# Altium PCB PowerBoard.PcbDoc (part 1 of 3)
Units mm, origin at the board's own origin, x right, y up, seen from the top; angles counter-clockwise.
Board outline 222.5 x 110 mm, 4 copper layers (Top Layer, Internal Plane 2, Internal Plane 1, Bottom Layer); 330 components, 249 nets, 1088 pads, 487 vias.
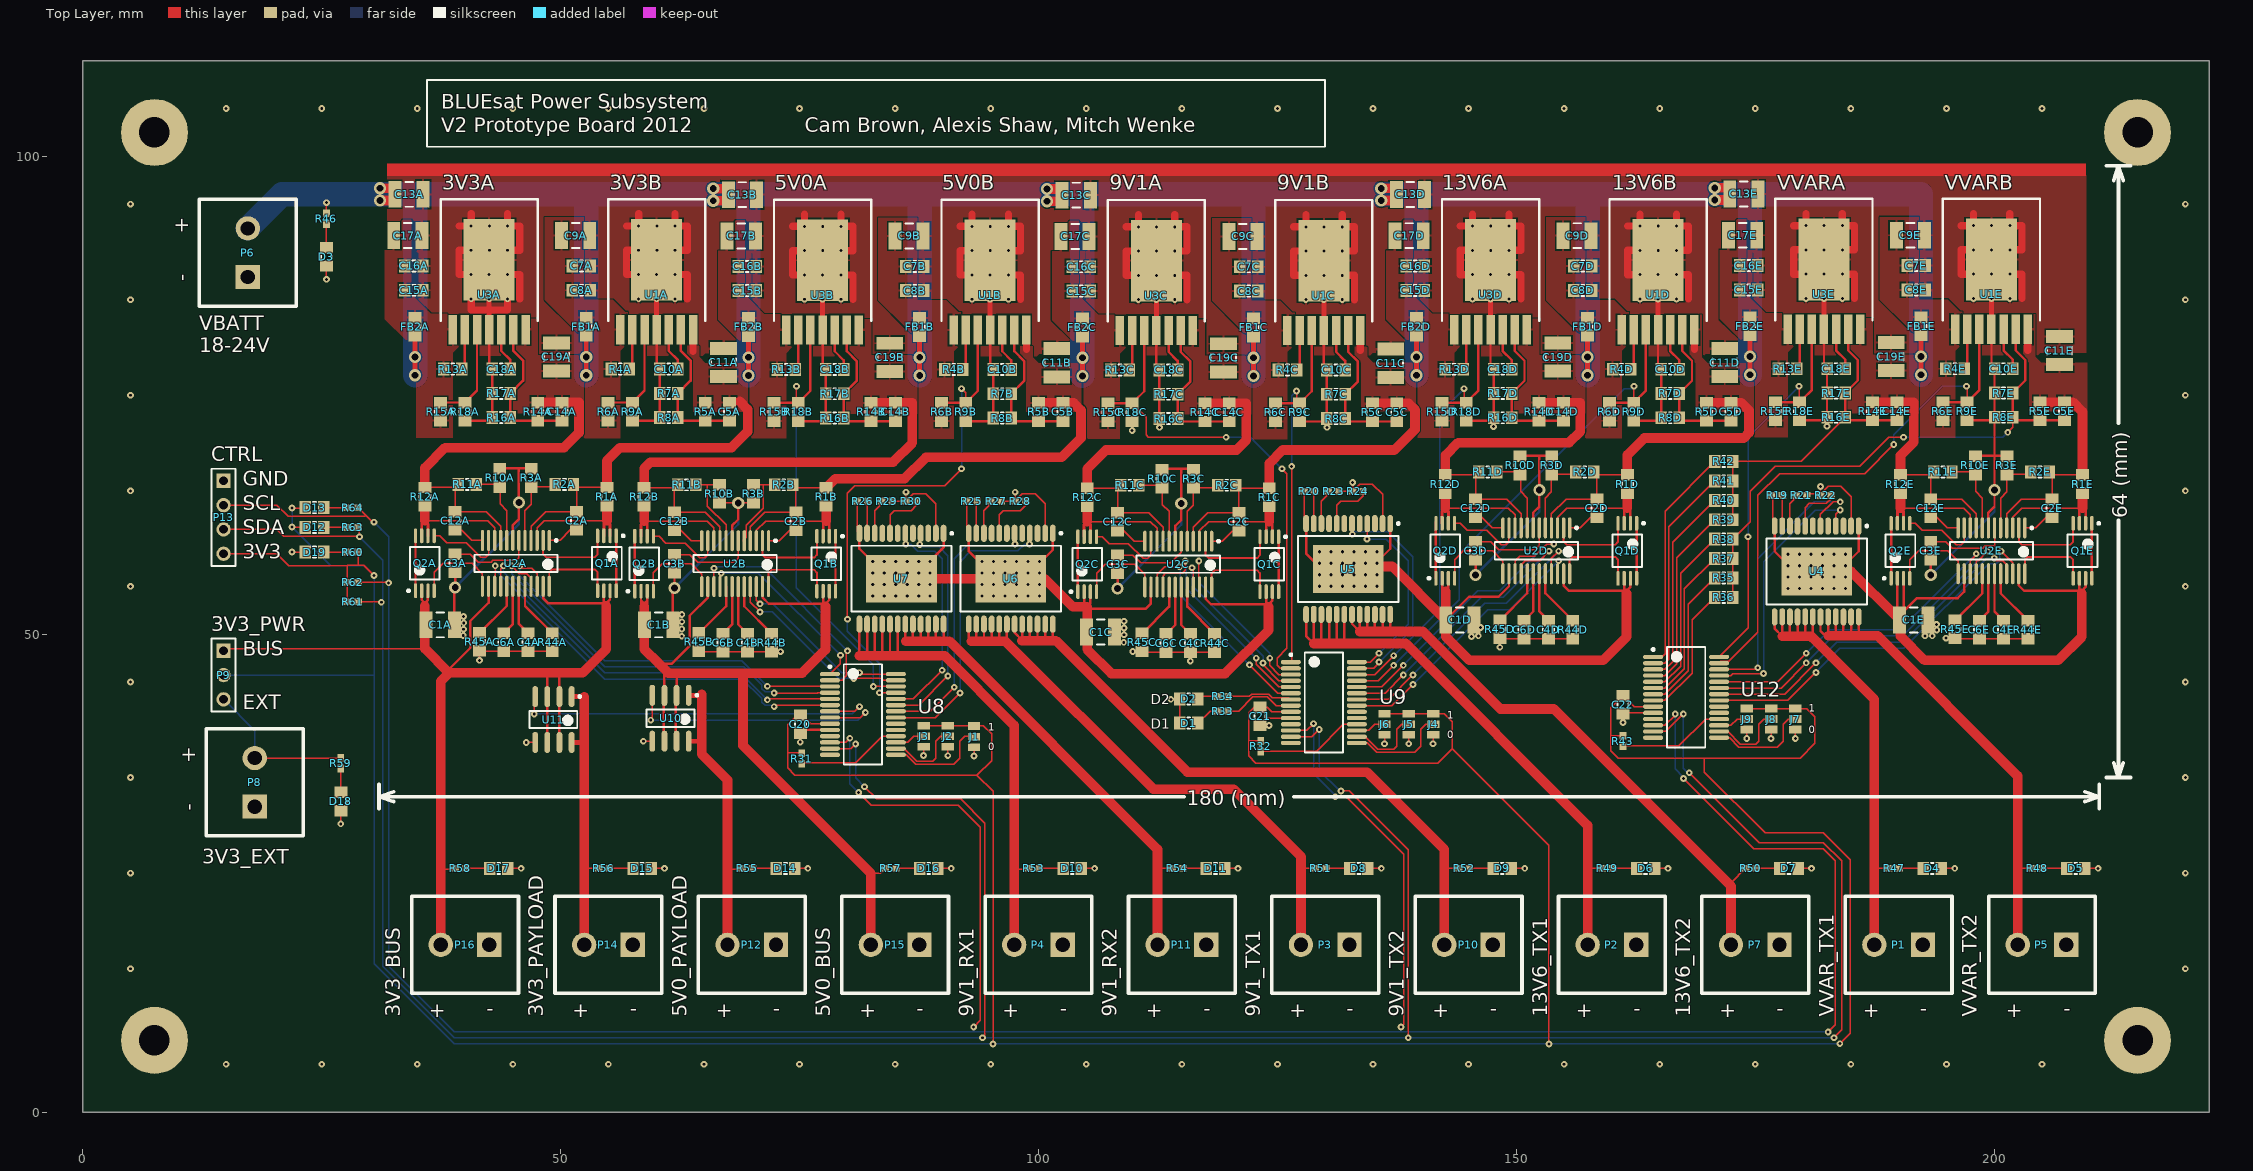
[diagram p0: Top Layer view]
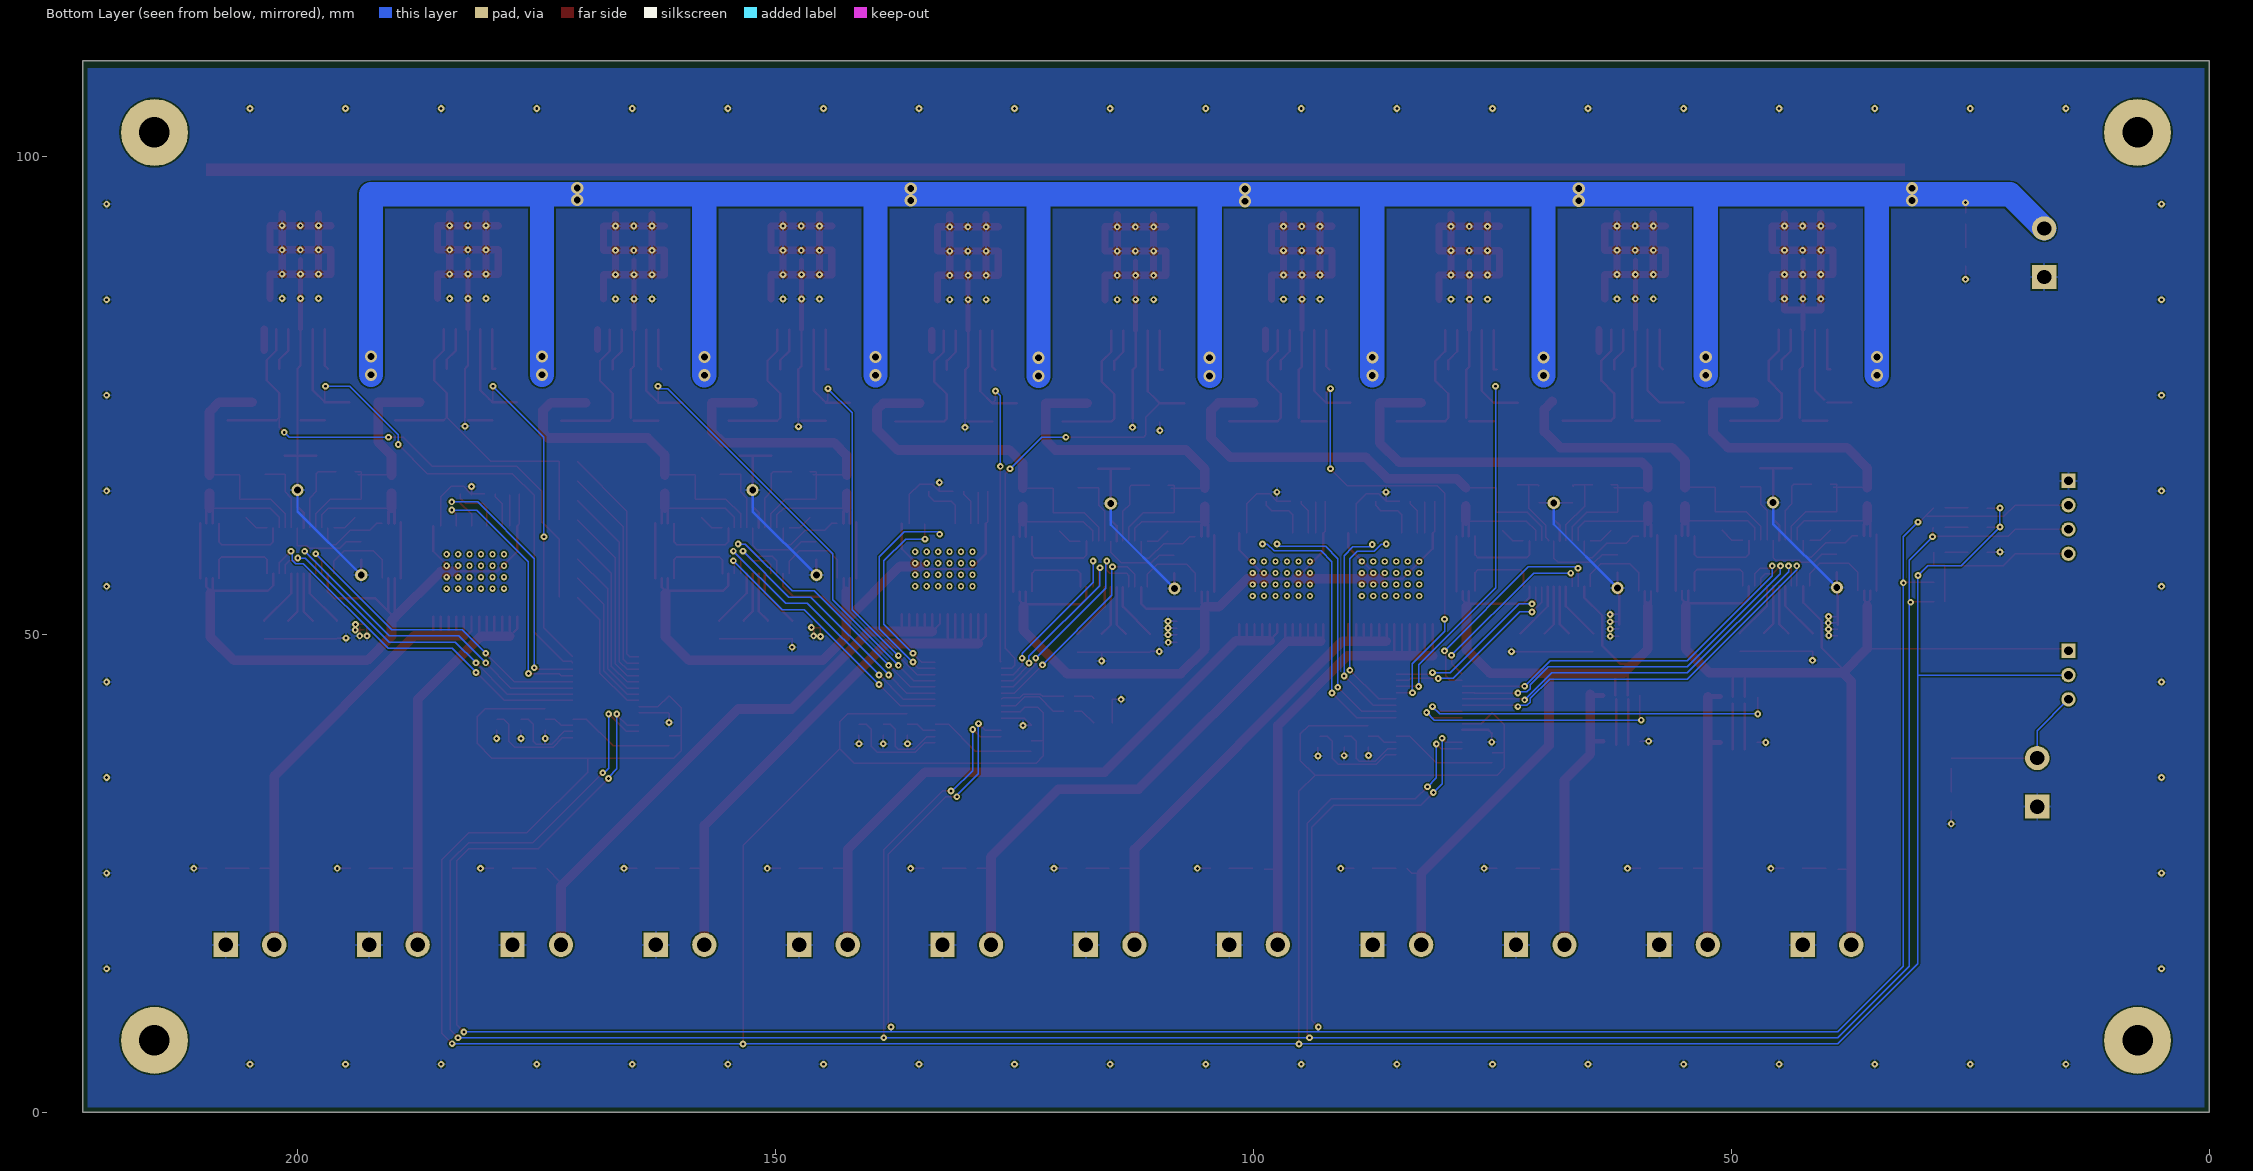
[diagram p1: Bottom Layer view, seen from below]
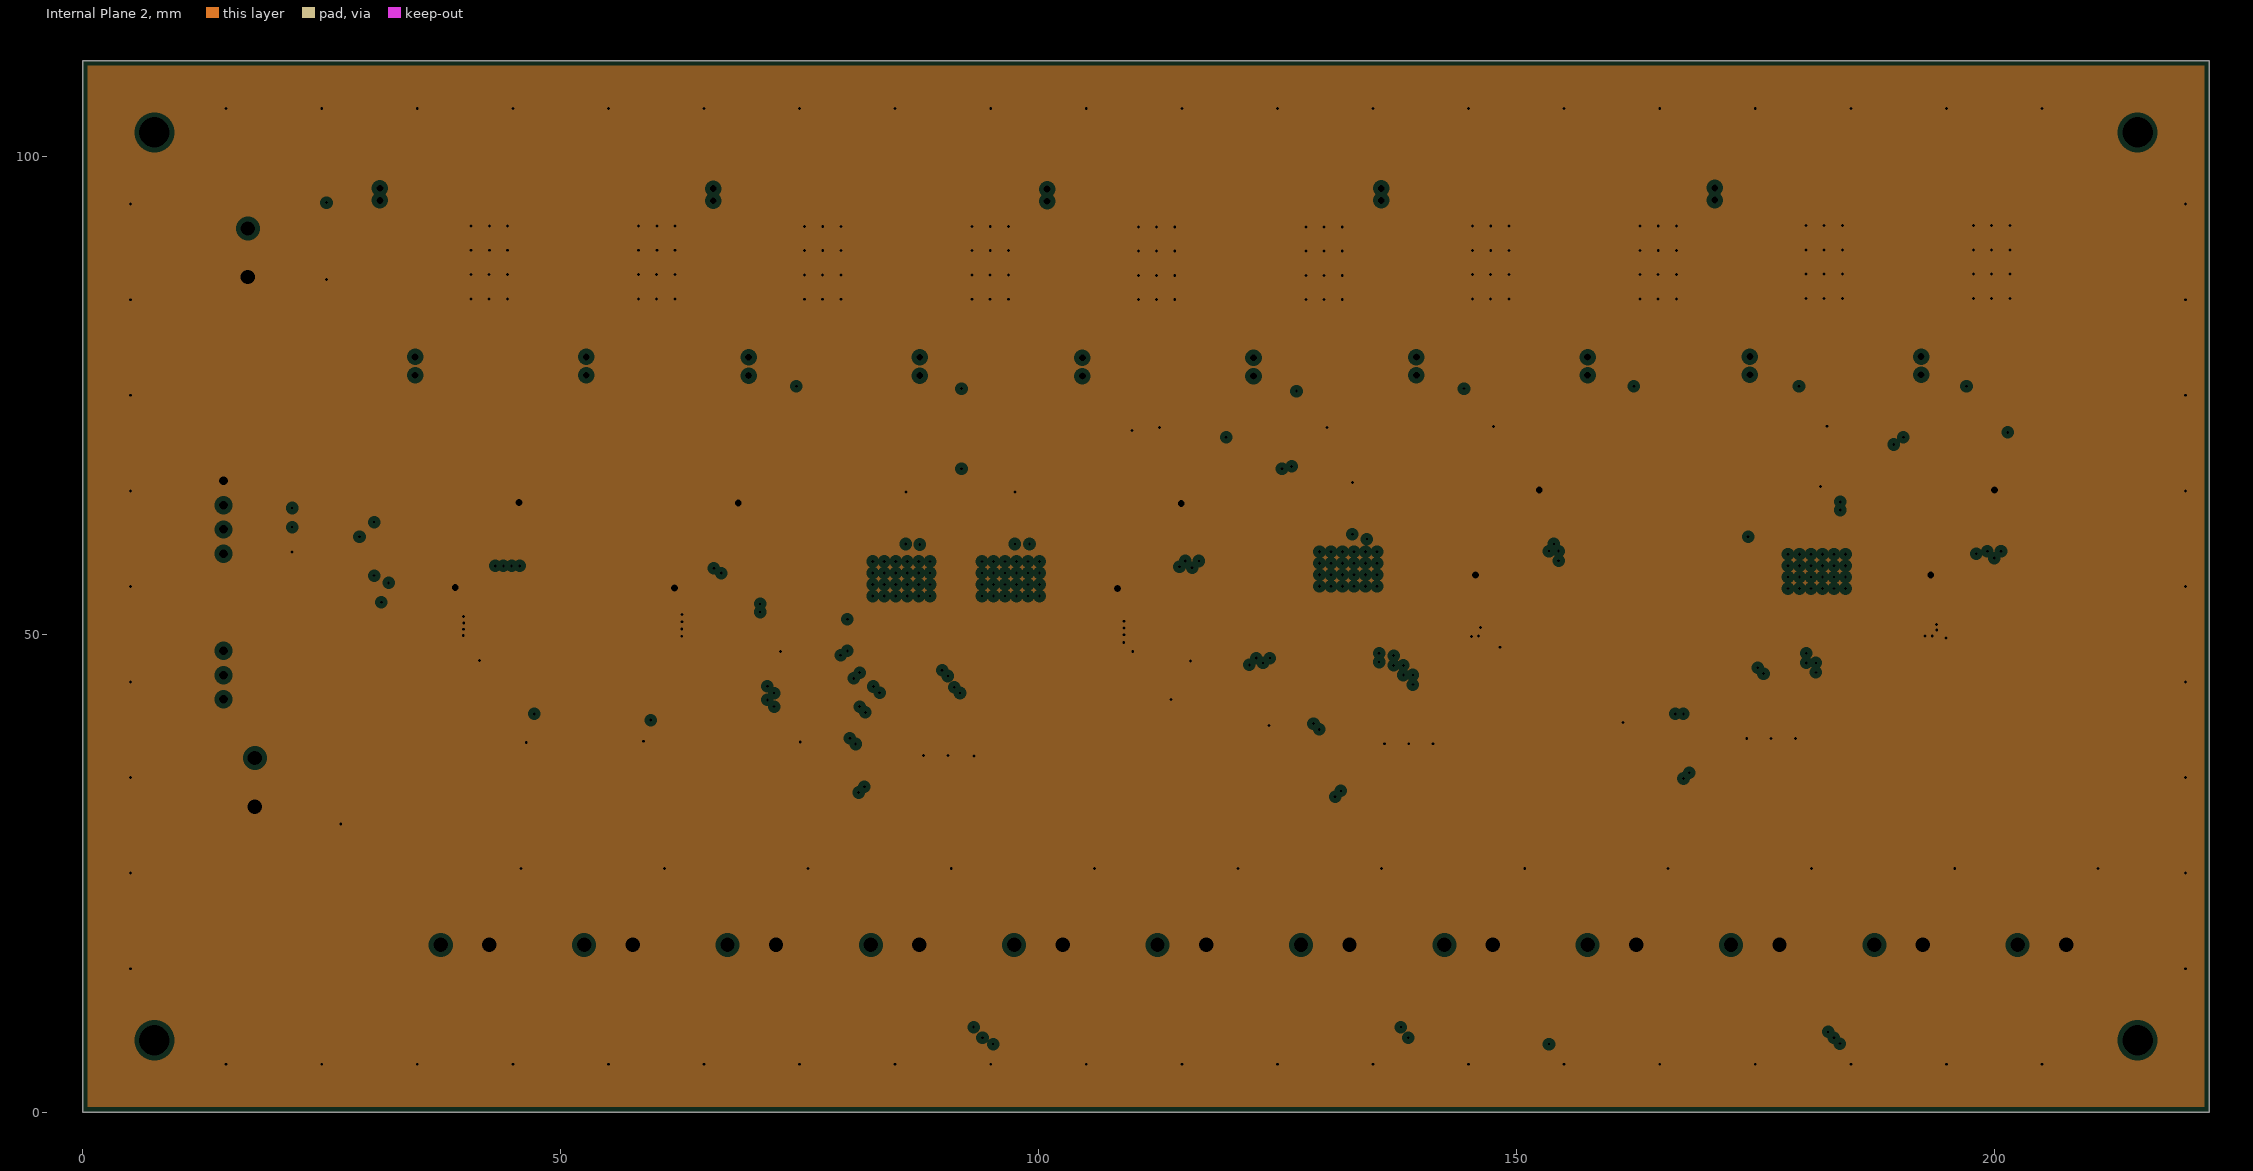
[diagram p2: Internal Plane 2, clearances drawn from the general rule]
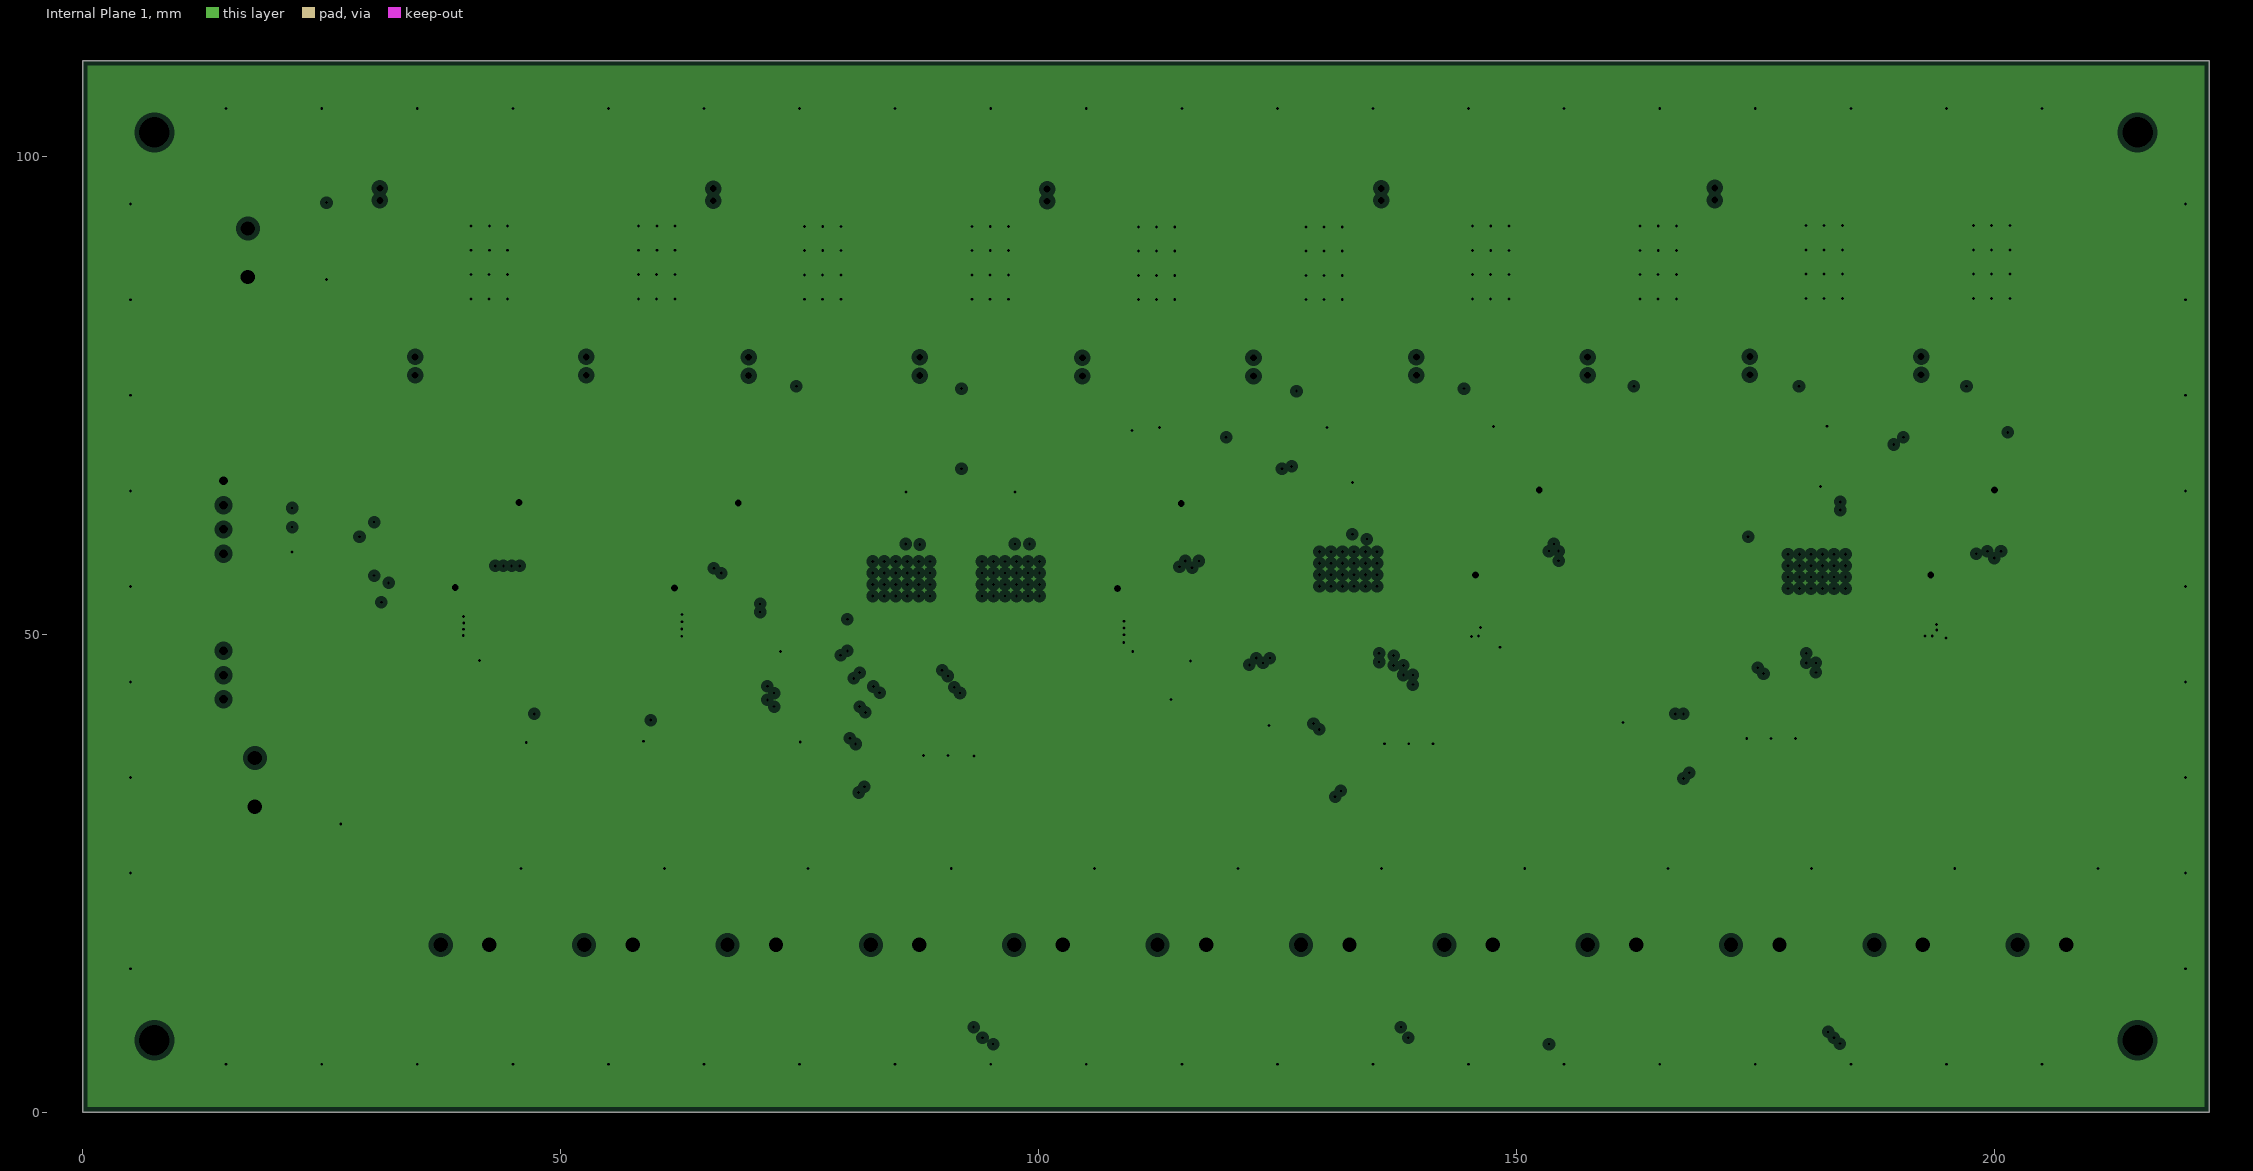
[diagram p3: Internal Plane 1, clearances drawn from the general rule]

## Layer stack, top to bottom
Top Layer: signal copper 0.0356
Dielectric: core 0.32, FR-4, Dk 4.8
Internal Plane 2: plane copper 0.0356, net GND
Dielectric: prepreg 0.32, FR-4, Dk 4.8
Internal Plane 1: plane copper 0.0356, net GND
Dielectric: core 0.32, FR-4, Dk 4.8
Bottom Layer: signal copper 0.0356

## Board outline
0,0 222.5,0 222.5,110 0,110

## Design rules (kind name [scope] priority, off if disabled: settings)
AssemblyTestPointUsage [All] p1 off:
AssemblyTestpoint [All] p1 off: testpointundercomponent=TRUE minsize=1.016 maxsize=2.54 preferedsize=1.524 minholesize=0 maxholesize=1.016 preferedholesize=0.813 testpointgrid=0.025 usegrid=TRUE gridtolerance=0 allowsidetop=TRUE allowsidebottom=TRUE
Clearance [All] p1: gap=0.152
FabricationTestPointUsage [All] p1 off: valid=0 allowmultiple=FALSE
FabricationTestpoint [All] p1 off: side=3 testpointundercomponent=TRUE minsize=1.016 maxsize=2.54 preferedsize=1.524 minholesize=0 maxholesize=1.016 preferedholesize=0.813 testpointgrid=0.025 allowsidetop=TRUE allowsidebottom=TRUE usegrid=TRUE gridtolerance=0
HoleSize [All] p1: absolutevalues=TRUE maxlimit=254 minlimit=0.025 maxpercent=80.000 minpercent=20.000
MinimumSolderMaskSliver [All] p1: minsoldermaskwidth=0.051
PlaneClearance [All] p1: clearance=0.508
PlaneConnect [All] p1: planeconnectstyle=Relief reliefexpansion=0.508 reliefentries=4 reliefconductorwidth=0.254 reliefairgap=0.254
PolygonConnect [All] p1: connectstyle=Relief reliefconductorwidth=0.254 reliefentries=4 polygonreliefangle="90 Angle"
RoomDefinition VVAR [InComponentClass('VVAR')] p1 off: confinementstyle=ConfineIn formatcopy=TRUE lockcomponents=FALSE outline 170.975,89.791 170.975,93.699 171.102,93.699 171.102,98.017 176.51,98.017 176.51,95.936 205.175,95.936 205.175,82.384 208.778,82.384 208.778,67.814 210.468,67.814 210.468,62.929 211.443,62.929 211.443,54.521 204.751,54.521 204.751,48.366 202.293,48.366 197.215,48.366 197.215,48.432 194.675,48.432 194.675,49.532 188.88,49.532 188.88,54.521 187.985,54.521 187.985,71.226 178.419,71.226 175.879,71.226 175.879,80.116 173.212,80.116 173.212,84.801 172.21,84.801 172.21,89.791
RoomDefinition 13V6 [InComponentClass('13V6')] p2 off: confinementstyle=ConfineIn formatcopy=TRUE lockcomponents=FALSE outline 136.085,89.742 136.085,93.65 136.212,93.65 136.212,97.968 141.62,97.968 141.62,95.887 170.285,95.887 170.285,81.131 173.763,81.131 173.763,67.765 175.578,67.765 175.578,62.88 176.553,62.88 176.553,54.472 169.863,54.472 169.863,48.317 167.405,48.317 162.325,48.317 162.325,48.383 159.785,48.383 159.785,52.797 148.265,52.797 148.265,71.177 143.529,71.177 140.989,71.177 140.989,80.067 138.322,80.067 138.322,84.752 137.32,84.752 137.32,89.742
RoomDefinition 9V1 [InComponentClass('9V1')] p3 off: confinementstyle=ConfineIn formatcopy=TRUE lockcomponents=FALSE outline 101.125,89.664 101.125,93.572 101.252,93.572 101.252,97.89 106.66,97.89 106.66,95.809 135.325,95.809 135.325,81.053 138.803,81.053 138.803,67.687 140.618,67.687 140.618,62.802 141.593,62.802 141.593,54.394 134.903,54.394 134.903,48.239 132.445,48.239 127.365,48.239 127.365,48.305 124.825,48.305 124.825,52.719 113.305,52.719 113.305,71.099 108.569,71.099 106.029,71.099 106.029,79.989 103.362,79.989 103.362,84.674 102.36,84.674 102.36,89.664
RoomDefinition 3V3 [InComponentClass('3V3')] p4 off: confinementstyle=ConfineIn formatcopy=TRUE lockcomponents=FALSE outline 31.311,89.751 31.311,93.659 31.438,93.659 31.438,97.977 36.846,97.977 36.846,95.896 65.511,95.896 65.511,81.14 68.989,81.14 68.989,67.774 70.804,67.774 70.804,62.889 71.779,62.889 71.779,54.481 65.089,54.481 65.089,48.326 62.631,48.326 57.551,48.326 57.551,48.392 55.011,48.392 55.011,52.806 43.491,52.806 43.491,71.186 38.755,71.186 36.215,71.186 36.215,80.076 33.548,80.076 33.548,84.761 32.546,84.761 32.546,89.751
RoutingVias [All] p1: holewidth=0.3 width=0.7 viastyle="Through Hole" minholewidth=0.3 minwidth=0.6 maxholewidth=0.711 maxwidth=1.27
SilkscreenOverComponentPads [All] p1: minsilkscreentomaskgap=0.076
SolderMaskExpansion [All] p1: expansion=0.025
Width [All] p1: maxlimit=2.54 minlimit=0.152 preferedwidth=0.254
19 further rules are at their usual default settings.

## Classes and differential pairs
channel class RedundantReg: 3V3 5V0 9V1 13V6 VVAR
component class VVAR: C1E C2E C3E C4E C5E C6E C7E C8E C9E C10E C11E C12E C13E C14E C15E C16E C17E C18E C19E FB1E FB2E Q1E Q2E R1E R2E R3E R4E R5E R6E R7E R8E R9E R10E R11E R12E R13E R14E R15E R16E R17E R18E R44E R45E U1E U2E U3E
component class Regulation: C20 C21 C22 D1 D2 J1 J2 J3 J4 J5 J6 J7 J8 J9 R19 R20 R21 R22 R23 R24 R25 R26 R27 R28 R29 R30 R31 R32 R33 R34 R35 R36 R37 R38 R39 R40 R41 R42 R43 U4 U5 U6 U7 U8 U9 U10 U11 U12
component class PowerBoard: D3 D4 D5 D6 D7 D8 D9 D10 D11 D12 D13 D14 D15 D16 D17 D18 D19 P1 P2 P3 P4 P5 P6 P7 P8 P9 P10 P11 P12 P13 P14 P15 P16 R46 R47 R48 R49 R50 R51 R52 R53 R54 R55 R56 R57 R58 R59 R60 R61 R62 R63 R64
component class 13V6: C1D C2D C3D C4D C5D C6D C7D C8D C9D C10D C11D C12D C13D C14D C15D C16D C17D C18D C19D FB1D FB2D Q1D Q2D R1D R2D R3D R4D R5D R6D R7D R8D R9D R10D R11D R12D R13D R14D R15D R16D R17D R18D R44D R45D U1D U2D U3D
component class 9V1: C1C C2C C3C C4C C5C C6C C7C C8C C9C C10C C11C C12C C13C C14C C15C C16C C17C C18C C19C FB1C FB2C Q1C Q2C R1C R2C R3C R4C R5C R6C R7C R8C R9C R10C R11C R12C R13C R14C R15C R16C R17C R18C R44C R45C U1C U2C U3C
component class 5V0: C1B C2B C3B C4B C5B C6B C7B C8B C9B C10B C11B C12B C13B C14B C15B C16B C17B C18B C19B FB1B FB2B Q1B Q2B R1B R2B R3B R4B R5B R6B R7B R8B R9B R10B R11B R12B R13B R14B R15B R16B R17B R18B R44B R45B U1B U2B U3B
component class 3V3: C1A C2A C3A C4A C5A C6A C7A C8A C9A C10A C11A C12A C13A C14A C15A C16A C17A C18A C19A FB1A FB2A Q1A Q2A R1A R2A R3A R4A R5A R6A R7A R8A R9A R10A R11A R12A R13A R14A R15A R16A R17A R18A R44A R45A U1A U2A U3A

## Components (designator, comment, footprint, x,y, rotation, side; value= is the part's Value field where it differs from the comment)
C1A "COUT2" R1210M 37.406,50.978 r180 top (schematic designator C1)
C1B "COUT2" R1210M 60.266,50.978 r180 top (schematic designator C1)
C1C "COUT2" R1210M 106.494,50.216 r180 top (schematic designator C1)
C1D "COUT2" R1210M 144.086,51.486 r180 top (schematic designator C1)
C1E "COUT2" R1210M 191.584,51.486 r180 top (schematic designator C1)
C2A "" R0805M 51.668,61.86 r270 top (schematic designator C2)
C2B "" R0805M 74.613,61.822 r270 top (schematic designator C2)
C2C "" R0805M 120.974,61.773 r270 top (schematic designator C2)
C2D "" R0805M 158.437,63.17 r270 top (schematic designator C2)
C2E "" R0805M 206.064,63.17 r270 top (schematic designator C2)
C3A "" R0805M 38.968,57.415 r270 top (schematic designator C3)
C3B "" R0805M 61.913,57.377 r270 top (schematic designator C3)
C3C "" R0805M 108.274,57.328 r270 top (schematic designator C3)
C3D "" R0805M 145.737,58.725 r270 top (schematic designator C3)
C3E "" R0805M 193.364,58.725 r270 top (schematic designator C3)
C4A "" R0805M 46.588,49.16 r90 top (schematic designator C4)
C4B "" R0805M 69.533,49.122 r90 top (schematic designator C4)
C4C "" R0805M 115.894,49.073 r90 top (schematic designator C4)
C4D "" R0805M 153.357,50.47 r90 top (schematic designator C4)
C4E "" R0805M 200.984,50.47 r90 top (schematic designator C4)
C5A "CFF" R0805M 67.67,73.29 r90 top (schematic designator C5)
C5B "CFF" R0805M 102.553,73.252 r90 top (schematic designator C5)
C5C "CFF" R0805M 137.484,73.203 r90 top (schematic designator C5)
C5D "CFF" R0805M 172.444,73.281 r90 top (schematic designator C5)
C5E "CFF" R0805M 207.334,73.33 r90 top (schematic designator C5)
C6A "" R0805M 44.048,49.16 r90 top (schematic designator C6)
C6B "" R0805M 66.993,49.122 r90 top (schematic designator C6)
C6C "" R0805M 113.354,49.073 r90 top (schematic designator C6)
C6D "" R0805M 150.817,50.47 r90 top (schematic designator C6)
C6E "" R0805M 198.444,50.47 r90 top (schematic designator C6)
C7A "CIN" R0805M 52.176,88.53 r180 top (schematic designator C7)
C7B "CIN" R0805M 87.059,88.492 r180 top (schematic designator C7)
C7C "CIN" R0805M 121.99,88.443 r180 top (schematic designator C7)
C7D "CIN" R0805M 156.95,88.521 r180 top (schematic designator C7)
C7E "CIN" R0805M 191.84,88.57 r180 top (schematic designator C7)
C8A "CIN" R0805M 52.176,85.99 r180 top (schematic designator C8)
C8B "CIN" R0805M 87.059,85.952 r180 top (schematic designator C8)
C8C "CIN" R0805M 121.99,85.903 r180 top (schematic designator C8)
C8D "CIN" R0805M 156.95,85.981 r180 top (schematic designator C8)
C8E "CIN" R0805M 191.84,86.03 r180 top (schematic designator C8)
C9A "CIN" R1210M 51.576,91.705 r0 top (schematic designator C9)
C9B "CIN" R1210M 86.459,91.667 r0 top (schematic designator C9)
C9C "CIN" R1210M 121.39,91.618 r0 top (schematic designator C9)
C9D "CIN" R1210M 156.35,91.696 r0 top (schematic designator C9)
C9E "CIN" R1210M 191.24,91.745 r0 top (schematic designator C9)
C10A "CSS" R0805M 61.32,77.735 r180 top (schematic designator C10)
C10B "CSS" R0805M 96.203,77.697 r180 top (schematic designator C10)
C10C "CSS" R0805M 131.134,77.648 r180 top (schematic designator C10)
C10D "CSS" R0805M 166.094,77.726 r180 top (schematic designator C10)
C10E "CSS" R0805M 200.984,77.775 r180 top (schematic designator C10)
C11A "COUT" R1210M 67.035,78.436 r270 top (schematic designator C11)
C11B "COUT" R1210M 101.918,78.398 r270 top (schematic designator C11)
C11C "COUT" R1210M 136.849,78.349 r270 top (schematic designator C11)
C11D "COUT" R1210M 171.809,78.427 r270 top (schematic designator C11)
C11E "COUT" R1210M 206.824,79.68 r270 top (schematic designator C11)
C12A "" R0805M 38.968,61.86 r90 top (schematic designator C12)
C12B "" R0805M 61.913,61.822 r90 top (schematic designator C12)
C12C "" R0805M 108.274,61.773 r90 top (schematic designator C12)
C12D "" R0805M 145.737,63.17 r90 top (schematic designator C12)
C12E "" R0805M 193.364,63.17 r90 top (schematic designator C12)
C13A "" R1210M 34.142,96.023 r0 top (schematic designator C13)
C13B "" R1210M 69.025,95.985 r0 top (schematic designator C13)
C13C "" R1210M 103.956,95.936 r0 top (schematic designator C13)
C13D "" R1210M 138.916,96.014 r0 top (schematic designator C13)
C13E "" R1210M 173.806,96.063 r0 top (schematic designator C13)
C14A "CFF" R0805M 50.144,73.29 r90 top (schematic designator C14)
C14B "CFF" R0805M 85.027,73.252 r90 top (schematic designator C14)
C14C "CFF" R0805M 119.958,73.203 r90 top (schematic designator C14)
C14D "CFF" R0805M 154.918,73.281 r90 top (schematic designator C14)
C14E "CFF" R0805M 189.808,73.33 r90 top (schematic designator C14)
C15A "CIN" R0805M 34.65,85.99 r180 top (schematic designator C15)
C15B "CIN" R0805M 69.533,85.952 r180 top (schematic designator C15)
C15C "CIN" R0805M 104.464,85.903 r180 top (schematic designator C15)
C15D "CIN" R0805M 139.424,85.981 r180 top (schematic designator C15)
C15E "CIN" R0805M 174.314,86.03 r180 top (schematic designator C15)
C16A "CIN" R0805M 34.65,88.53 r180 top (schematic designator C16)
C16B "CIN" R0805M 69.533,88.492 r180 top (schematic designator C16)
C16C "CIN" R0805M 104.464,88.443 r180 top (schematic designator C16)
C16D "CIN" R0805M 139.424,88.521 r180 top (schematic designator C16)
C16E "CIN" R0805M 174.314,88.57 r180 top (schematic designator C16)
C17A "CIN" R1210M 34.015,91.705 r0 top (schematic designator C17)
C17B "CIN" R1210M 68.898,91.667 r0 top (schematic designator C17)
C17C "CIN" R1210M 103.829,91.618 r0 top (schematic designator C17)
C17D "CIN" R1210M 138.789,91.696 r0 top (schematic designator C17)
C17E "CIN" R1210M 173.679,91.745 r0 top (schematic designator C17)
C18A "CSS" R0805M 43.794,77.735 r180 top (schematic designator C18)
C18B "CSS" R0805M 78.677,77.697 r180 top (schematic designator C18)
C18C "CSS" R0805M 113.608,77.648 r180 top (schematic designator C18)
C18D "CSS" R0805M 148.568,77.726 r180 top (schematic designator C18)
C18E "CSS" R0805M 183.458,77.775 r180 top (schematic designator C18)
C19A "COUT" R1210M 49.558,79.005 r270 top (schematic designator C19)
C19B "COUT" R1210M 84.441,78.967 r270 top (schematic designator C19)
C19C "COUT" R1210M 119.372,78.918 r270 top (schematic designator C19)
C19D "COUT" R1210M 154.332,78.996 r270 top (schematic designator C19)
C19E "COUT" R1210M 189.222,79.045 r270 top (schematic designator C19)
C20 "" R0805M 75.08,40.588 r270 top
C21 "" R0805M 123.19,41.402 r270 top
C22 "" R0805M 161.158,42.632 r270 top
D1 "LED0" R0805M 115.732,40.692 r180 top
D2 "LED0" R0805M 115.732,43.232 r180 top
D3 "LED0" R0805M 25.5,89.476 r270 top
D4 "LED0" R0805M 193.524,25.5 r0 top
D5 "LED0" R0805M 208.524,25.5 r0 top
D6 "LED0" R0805M 163.524,25.5 r0 top
D7 "LED0" R0805M 178.524,25.5 r0 top
D8 "LED0" R0805M 133.524,25.5 r0 top
D9 "LED0" R0805M 148.524,25.5 r0 top
D10 "LED0" R0805M 103.524,25.5 r0 top
D11 "LED0" R0805M 118.524,25.5 r0 top
D12 "LED0" R0805M 24.25,61.17 r0 top
D13 "LED0" R0805M 24.25,63.242 r0 top
D14 "LED0" R0805M 73.524,25.5 r0 top
D15 "LED0" R0805M 58.524,25.5 r0 top
D16 "LED0" R0805M 88.524,25.5 r0 top
D17 "LED0" R0805M 43.524,25.5 r0 top
D18 "LED0" R0805M 27,32.5 r270 top
D19 "LED0" R0805M 24.25,58.59 r180 top
FB1A "" R0805M 52.684,82.18 r270 top (schematic designator FB1)
FB1B "" R0805M 87.567,82.142 r270 top (schematic designator FB1)
FB1C "" R0805M 122.498,82.093 r270 top (schematic designator FB1)
FB1D "" R0805M 157.458,82.171 r270 top (schematic designator FB1)
FB1E "" R0805M 192.348,82.22 r270 top (schematic designator FB1)
FB2A "" R0805M 34.777,82.18 r270 top (schematic designator FB2)
FB2B "" R0805M 69.66,82.142 r270 top (schematic designator FB2)
FB2C "" R0805M 104.591,82.093 r270 top (schematic designator FB2)
FB2D "" R0805M 139.551,82.171 r270 top (schematic designator FB2)
FB2E "" R0805M 174.441,82.22 r270 top (schematic designator FB2)
J1 "3-WAY JUMPER" J1205M 93.256,39.278 r270 top
J2 "3-WAY JUMPER" J1205M 90.516,39.327 r270 top
J3 "3-WAY JUMPER" J1205M 87.976,39.327 r270 top
J4 "3-WAY JUMPER" J1205M 141.286,40.564 r270 top
J5 "3-WAY JUMPER" J1205M 138.746,40.564 r270 top
J6 "3-WAY JUMPER" J1205M 136.206,40.564 r270 top
J7 "3-WAY JUMPER" J1205M 179.192,41.117 r270 top
J8 "3-WAY JUMPER" J1205M 176.652,41.117 r270 top
J9 "3-WAY JUMPER" J1205M 174.112,41.117 r270 top
P1 "VVAR_TX1" "200MIL TERMINAL" 190,17.5 r180 top
P2 "13V6_TX1" "200MIL TERMINAL" 160,17.5 r180 top
P3 "9V1_TX1" "200MIL TERMINAL" 130,17.5 r180 top
P4 "9V1_RX1" "200MIL TERMINAL" 100,17.5 r180 top
P5 "VVAR_TX2" "200MIL TERMINAL" 205,17.5 r180 top
P6 "VBATT" "200MIL TERMINAL" 17.272,89.916 r90 top
P7 "13V6_TX2" "200MIL TERMINAL" 175,17.5 r180 top
P8 "3V3_EXT" "200MIL TERMINAL" 18,34.5 r90 top
P9 "3V3_PWR SEL" HDR1X3 14.732,48.26 r270 top
P10 "9V1_TX2" "200MIL TERMINAL" 145,17.5 r180 top
P11 "9V1_RX2" "200MIL TERMINAL" 115,17.5 r180 top
P12 "5V0_PAYLOAD" "200MIL TERMINAL" 70,17.5 r180 top
P13 "I2C" HDR1X4 14.732,66.04 r270 top
P14 "3V3_PAYLOAD" "200MIL TERMINAL" 55,17.5 r180 top
P15 "5V0_BUS" "200MIL TERMINAL" 85,17.5 r180 top
P16 "3V3_BUS" "200MIL TERMINAL" 40,17.5 r180 top
Q1A "IRF8852" TSSOP8 54.843,57.415 r270 top (schematic designator Q1)
Q1B "IRF8852" TSSOP8 77.788,57.377 r270 top (schematic designator Q1)
Q1C "IRF8852" TSSOP8 124.149,57.328 r270 top (schematic designator Q1)
Q1D "IRF8852" TSSOP8 161.612,58.725 r270 top (schematic designator Q1)
Q1E "IRF8852" TSSOP8 209.239,58.725 r270 top (schematic designator Q1)
Q2A "IRF8852" TSSOP8 35.793,57.415 r90 top (schematic designator Q2)
Q2B "IRF8852" TSSOP8 58.738,57.377 r90 top (schematic designator Q2)
Q2C "IRF8852" TSSOP8 105.099,57.328 r90 top (schematic designator Q2)
Q2D "IRF8852" TSSOP8 142.562,58.725 r90 top (schematic designator Q2)
Q2E "IRF8852" TSSOP8 190.189,58.725 r90 top (schematic designator Q2)
R1A "ISENSE" R0805M 54.843,64.4 r270 top (schematic designator R1)
R1B "ISENSE" R0805M 77.788,64.362 r270 top (schematic designator R1)
R1C "ISENSE" R0805M 124.149,64.313 r270 top (schematic designator R1)
R1D "ISENSE" R0805M 161.612,65.71 r270 top (schematic designator R1)
R1E "ISENSE" R0805M 209.239,65.71 r270 top (schematic designator R1)
R2A "ON1" R0805M 50.398,65.67 r180 top (schematic designator R2)
R2B "ON1" R0805M 73.343,65.632 r180 top (schematic designator R2)
R2C "ON1" R0805M 119.704,65.583 r180 top (schematic designator R2)
R2D "ON1" R0805M 157.167,66.98 r180 top (schematic designator R2)
R2E "ON1" R0805M 204.794,66.98 r180 top (schematic designator R2)
R3A "ON2" R0805M 46.931,66.345 r270 top (schematic designator R3)
R3B "ON2" R0805M 70.172,64.694 r90 top (schematic designator R3)
R3C "ON2" R0805M 116.237,66.258 r270 top (schematic designator R3)
R3D "ON2" R0805M 153.7,67.655 r270 top (schematic designator R3)
R3E "ON2" R0805M 201.327,67.655 r270 top (schematic designator R3)
R4A "RON" R0805M 56.24,77.735 r180 top (schematic designator R4)
R4B "RON" R0805M 91.123,77.697 r180 top (schematic designator R4)
R4C "RON" R0805M 126.054,77.648 r180 top (schematic designator R4)
R4D "RON" R0805M 161.014,77.726 r180 top (schematic designator R4)
R4E "RON" R0805M 195.904,77.775 r180 top (schematic designator R4)
R5A "RFBT" R0805M 65.13,73.29 r90 top (schematic designator R5)
R5B "RFBT" R0805M 100.013,73.252 r90 top (schematic designator R5)
R5C "RFBT" R0805M 134.944,73.203 r90 top (schematic designator R5)
R5D "RFBT" R0805M 169.904,73.281 r90 top (schematic designator R5)
R5E "RFBT" R0805M 204.794,73.33 r90 top (schematic designator R5)
R6A "RENT" R0805M 54.97,73.29 r90 top (schematic designator R6)
R6B "RENT" R0805M 89.853,73.252 r90 top (schematic designator R6)
R6C "RENT" R0805M 124.784,73.203 r90 top (schematic designator R6)
R6D "RENT" R0805M 159.744,73.281 r90 top (schematic designator R6)
R6E "RENT" R0805M 194.634,73.33 r90 top (schematic designator R6)
R7A "RFBB" R0805M 61.32,75.195 r0 top (schematic designator R7)
R7B "RFBB" R0805M 96.203,75.157 r0 top (schematic designator R7)
R7C "RFBB" R0805M 131.134,75.108 r0 top (schematic designator R7)
R7D "RFBB" R0805M 166.094,75.186 r0 top (schematic designator R7)
R7E "RFBB" R0805M 200.984,75.235 r0 top (schematic designator R7)
R8A "RFBB" R0805M 61.32,72.655 r0 top (schematic designator R8)
R8B "RFBB" R0805M 96.203,72.617 r0 top (schematic designator R8)
R8C "RFBB" R0805M 131.134,72.568 r0 top (schematic designator R8)
R8D "RFBB" R0805M 166.094,72.646 r0 top (schematic designator R8)
R8E "RFBB" R0805M 200.984,72.695 r0 top (schematic designator R8)
R9A "RENB" R0805M 57.51,73.29 r270 top (schematic designator R9)
R9B "RENB" R0805M 92.393,73.252 r270 top (schematic designator R9)
R9C "RENB" R0805M 127.324,73.203 r270 top (schematic designator R9)
R9D "RENB" R0805M 162.284,73.281 r270 top (schematic designator R9)
R9E "RENB" R0805M 197.174,73.33 r270 top (schematic designator R9)
R10A "ON2" R0805M 43.629,66.345 r270 top (schematic designator R10)
R10B "ON2" R0805M 66.612,64.694 r90 top (schematic designator R10)
R10C "ON2" R0805M 112.935,66.258 r270 top (schematic designator R10)
R10D "ON2" R0805M 150.398,67.655 r270 top (schematic designator R10)
R10E "ON2" R0805M 198.025,67.655 r270 top (schematic designator R10)
R11A "ON1" R0805M 40.238,65.67 r0 top (schematic designator R11)
R11B "ON1" R0805M 63.183,65.632 r0 top (schematic designator R11)
R11C "ON1" R0805M 109.544,65.583 r0 top (schematic designator R11)
R11D "ON1" R0805M 147.007,66.98 r0 top (schematic designator R11)
R11E "ON1" R0805M 194.634,66.98 r0 top (schematic designator R11)
R12A "ISENSE" R0805M 35.793,64.4 r270 top (schematic designator R12)
R12B "ISENSE" R0805M 58.738,64.362 r270 top (schematic designator R12)
R12C "ISENSE" R0805M 105.099,64.313 r270 top (schematic designator R12)
R12D "ISENSE" R0805M 142.562,65.71 r270 top (schematic designator R12)
R12E "ISENSE" R0805M 190.189,65.71 r270 top (schematic designator R12)
R13A "RON" R0805M 38.714,77.735 r180 top (schematic designator R13)
R13B "RON" R0805M 73.597,77.697 r180 top (schematic designator R13)
R13C "RON" R0805M 108.528,77.648 r180 top (schematic designator R13)
R13D "RON" R0805M 143.488,77.726 r180 top (schematic designator R13)
R13E "RON" R0805M 178.378,77.775 r180 top (schematic designator R13)
R14A "RFBT" R0805M 47.604,73.29 r90 top (schematic designator R14)
R14B "RFBT" R0805M 82.487,73.252 r90 top (schematic designator R14)
R14C "RFBT" R0805M 117.418,73.203 r90 top (schematic designator R14)
R14D "RFBT" R0805M 152.378,73.281 r90 top (schematic designator R14)
R14E "RFBT" R0805M 187.268,73.33 r90 top (schematic designator R14)
R15A "RENT" R0805M 37.444,73.29 r90 top (schematic designator R15)
R15B "RENT" R0805M 72.327,73.252 r90 top (schematic designator R15)
R15C "RENT" R0805M 107.258,73.203 r90 top (schematic designator R15)
R15D "RENT" R0805M 142.218,73.281 r90 top (schematic designator R15)
R15E "RENT" R0805M 177.108,73.33 r90 top (schematic designator R15)
R16A "RFBB" R0805M 43.794,72.655 r0 top (schematic designator R16)
R16B "RFBB" R0805M 78.677,72.617 r0 top (schematic designator R16)
R16C "RFBB" R0805M 113.608,72.568 r0 top (schematic designator R16)
R16D "RFBB" R0805M 148.568,72.646 r0 top (schematic designator R16)
R16E "RFBB" R0805M 183.458,72.695 r0 top (schematic designator R16)
R17A "RFBB" R0805M 43.794,75.195 r0 top (schematic designator R17)
R17B "RFBB" R0805M 78.677,75.157 r0 top (schematic designator R17)
R17C "RFBB" R0805M 113.608,75.108 r0 top (schematic designator R17)
R17D "RFBB" R0805M 148.568,75.186 r0 top (schematic designator R17)
R17E "RFBB" R0805M 183.458,75.235 r0 top (schematic designator R17)
R18A "RENB" R0805M 39.984,73.29 r270 top (schematic designator R18)
R18B "RENB" R0805M 74.867,73.252 r270 top (schematic designator R18)
R18C "RENB" R0805M 109.798,73.203 r270 top (schematic designator R18)
R18D "RENB" R0805M 144.758,73.281 r270 top (schematic designator R18)
R18E "RENB" R0805M 179.648,73.33 r270 top (schematic designator R18)
R19 "" R0402M 177.292,64.516 r0 top
R20 "" R0402M 128.338,64.948 r0 top
R21 "" R0402M 179.832,64.516 r0 top
R22 "" R0402M 182.372,64.516 r180 top
R23 "" R0402M 130.878,64.948 r0 top
R24 "" R0402M 133.418,64.948 r180 top
R25 "" R0402M 93.032,63.932 r0 top
R26 "" R0402M 81.602,63.932 r0 top
R27 "" R0402M 95.572,63.932 r0 top
R28 "" R0402M 98.112,63.932 r180 top
R29 "" R0402M 84.142,63.932 r0 top
R30 "" R0402M 86.682,63.932 r180 top
R31 "" R0402M 75.222,36.992 r270 top
R32 "" R0402M 123.252,38.278 r270 top
R33 "" R0402M 119.288,41.962 r180 top
R34 "" R0402M 119.288,43.486 r180 top
R35 "VSET_1" R0805M 171.704,55.88 r0 top
R36 "VSET_1" R0805M 171.704,53.848 r0 top
R37 "VSET_1" R0805M 171.704,57.912 r0 top
R38 "VSET_1" R0805M 171.704,59.944 r0 top
R39 "VSET_1" R0805M 171.704,61.976 r0 top
R40 "VSET_1" R0805M 171.704,64.008 r0 top
R41 "VSET_1" R0805M 171.704,66.04 r0 top
R42 "VSET_1" R0805M 171.704,68.072 r0 top
R43 "" R0402M 161.158,38.822 r270 top
R44A "" R0805M 49.128,49.16 r270 top (schematic designator R44)
R44B "" R0805M 72.073,49.122 r270 top (schematic designator R44)
R44C "" R0805M 118.434,49.073 r270 top (schematic designator R44)
R44D "" R0805M 155.897,50.47 r270 top (schematic designator R44)
R44E "" R0805M 203.522,50.47 r270 top (schematic designator R44)
R45A "" R0805M 41.508,49.226 r270 top (schematic designator R45)
R45B "" R0805M 64.453,49.188 r270 top (schematic designator R45)
R45C "" R0805M 110.814,49.139 r270 top (schematic designator R45)
R45D "" R0805M 148.277,50.536 r270 top (schematic designator R45)
R45E "" R0805M 195.904,50.536 r270 top (schematic designator R45)
R46 "" R0402M 25.5,93.476 r270 top
R47 "" R0402M 189.524,25.5 r0 top
R48 "" R0402M 204.524,25.5 r0 top
R49 "" R0402M 159.524,25.5 r0 top
R50 "" R0402M 174.524,25.5 r0 top
R51 "" R0402M 129.524,25.5 r0 top
R52 "" R0402M 144.524,25.5 r0 top
R53 "" R0402M 99.524,25.5 r0 top
R54 "" R0402M 114.524,25.5 r0 top
R55 "" R0402M 69.524,25.5 r0 top
R56 "" R0402M 54.524,25.5 r0 top
R57 "" R0402M 84.524,25.5 r0 top
R58 "" R0402M 39.524,25.5 r0 top
R59 "" R0402M 27,36.5 r270 top
R60 "" R0402M 28.25,58.59 r180 top
R61 "" R0402M 28.245,53.391 r0 top
R62 "" R0402M 28.245,55.423 r0 top
R63 "" R0402M 28.25,61.17 r180 top
R64 "" R0402M 28.25,63.242 r180 top
U1A "LMZ14201H" TO-PMOD-7 60.05,89.165 r0 top (schematic designator U1)
U1B "LMZ14201H" TO-PMOD-7 94.933,89.127 r0 top (schematic designator U1)
U1C "LMZ14201H" TO-PMOD-7 129.864,89.078 r0 top (schematic designator U1)
U1D "LMZ14201H" TO-PMOD-7 164.824,89.156 r0 top (schematic designator U1)
U1E "LMZ14201H" TO-PMOD-7 199.714,89.205 r0 top (schematic designator U1)
U2A "LTC4225" SSOP24 45.318,57.415 r270 top (schematic designator U2)
U2B "LTC4225" SSOP24 68.263,57.377 r270 top (schematic designator U2)
U2C "LTC4225" SSOP24 114.624,57.328 r270 top (schematic designator U2)
U2D "LTC4225" SSOP24 152.087,58.725 r270 top (schematic designator U2)
U2E "LTC4225" SSOP24 199.714,58.725 r270 top (schematic designator U2)
U3A "LMZ14201H" TO-PMOD-7 42.524,89.165 r0 top (schematic designator U3)
U3B "LMZ14201H" TO-PMOD-7 77.407,89.127 r0 top (schematic designator U3)
U3C "LMZ14201H" TO-PMOD-7 112.338,89.078 r0 top (schematic designator U3)
U3D "LMZ14201H" TO-PMOD-7 147.298,89.156 r0 top (schematic designator U3)
U3E "LMZ14201H" TO-PMOD-7 182.188,89.205 r0 top (schematic designator U3)
U4 "VND5E025AK-E" SSO24 181.424,56.566 r270 top
U5 "VND5E025AK-E" SSO24 132.402,56.82 r270 top
U6 "VND5E025AK-E" SSO24 97.096,55.804 r270 top
U7 "VND5E025AK-E" SSO24 85.666,55.804 r270 top
U8 "MCP23017" SSOP28 81.626,41.604 r0 top
U9 "MCP23017" SSOP28 129.856,42.85 r0 top
U10 "LTC1477" SO8 61.498,41.203 r270 top
U11 "LTC1477" SO8 49.243,41.072 r270 top
U12 "MCP23017" SSOP28 167.762,43.394 r0 top

## Footprints (in the part's own frame and the unit in brackets; to place one, negate y for a bottom-side part, rotate by r counter-clockwise, add the part's x,y. Pads: shape width x height; smd on the part's side, far side on the other; paste and mask are expansions set on the pad)
"200MIL TERMINAL" [mm]
  rect 2.54x2.54 hole 1.5: 1(-2.54,0)
  round 2.54 hole 1.5: 2(2.54,0)
  silkscreen extent -5.59,-5.08 5.59,5.08
HDR1X3 [mm] "Connector; Header; 3 Position"
  rect 1.5x1.5 hole 0.9: 1(0,0)
  round 1.5 hole 0.9: 2(2.54,0) 3(5.08,0)
  silkscreen extent -1.27,-1.27 6.35,1.27
HDR1X4 [mm] "Connector; Header; 4 Position"
  rect 1.5x1.5 hole 0.9: 1(0,0)
  round 1.5 hole 0.9: 2(2.54,0) 3(5.08,0) 4(7.62,0)
  silkscreen extent -1.27,-1.27 8.89,1.27
J1205M [mm] "Chip Resistor, 2-Leads, Body 1.0x0.5mm, IPC Medium Density"
  rect 0.8x1.3 smd: 1(-1.109,0) 2(-0.009,0) 3(1.091,0)
  body extent -1.32,-0.51 1.35,0.51, height 0.6
R0402M [mm] "Chip Resistor, 2-Leads, Body 1.0x0.5mm, IPC Medium Density"
  rect 0.8x0.7 smd: 1(-0.55,0) 2(0.55,0)
  body extent -0.55,-0.3 0.55,0.3, height 0.6
R0805M [mm] "Chip Resistor, 2-Leads, Body 2.0x1.3mm, IPC Medium Density"
  rect 1.2x1.35 smd: 1(-0.95,0) 2(0.95,0)
  silkscreen extent -0.15,-0.58 0.15,0.58, body extent -1.1,-0.67 1.1,0.67, height 0.6
R1210M [mm] "Chip Capacitor, 2-Leads, Body 3.2x2.5mm, IPC Medium Density"
  rect 1.35x2.8 smd: 1(-1.475,0) 2(1.475,0)
  silkscreen extent -0.4,-1.3 0.4,1.3, body extent -1.75,-1.4 1.75,1.4, height 1.5
SO8 [mm]
  oval 2.2x0.6 smd: 1(-2.4,1.905) 2(-2.4,0.635) 3(-2.4,-0.635) 4(-2.4,-1.905) 5(2.4,-1.905) 6(2.4,-0.635) 7(2.4,0.635) 8(2.4,1.905)
  silkscreen extent -2.52,-2.5 0.9,2.88, body extent -2,-2.5 2,2.5, height 1.8
SSO24 [mm]
  oval 1.8x0.6 smd: 3(-4.75,2.8) 5(-4.75,1.2) 7(-4.75,-0.4) 9(-4.75,-2) CS1(-4.75,-1.2) CS2(-4.75,-2.8) CS_DIS(-4.75,-3.6) GND(-4.75,3.6) IN1(-4.75,0.4) IN2(-4.75,2) OUT1(4.75,-1.2) OUT1(4.75,-0.4) OUT1(4.75,-4.4) OUT1(4.75,-3.6) OUT1(4.75,-2.8) OUT1(4.75,-2) OUT2(4.75,2) OUT2(4.75,2.8) OUT2(4.75,3.6) OUT2(4.75,4.4) OUT2(4.75,0.4) OUT2(4.75,1.2) VCC(-4.75,4.4) VCC(-4.75,-4.4)
  rect 5x7.4 smd: VCC(0,0)
  silkscreen extent -4.87,-5.25 3.45,5.38, body extent -3.8,-5.25 3.8,5.25, height 2.45
SSOP24 [mm]
  oval 2.2x0.35 smd: 1(-2.4,3.492) 2(-2.4,2.857) 3(-2.4,2.222) 4(-2.4,1.587) 5(-2.4,0.952) 6(-2.4,0.317) 7(-2.4,-0.318) 8(-2.4,-0.953) 9(-2.4,-1.588) 10(-2.4,-2.223) 11(-2.4,-2.858) 12(-2.4,-3.493) 13(2.4,-3.492) 14(2.4,-2.857) 15(2.4,-2.222) 16(2.4,-1.587) 17(2.4,-0.952) 18(2.4,-0.317) 19(2.4,0.318) 20(2.4,0.953) 21(2.4,1.588) 22(2.4,2.223) 23(2.4,2.858) 24(2.4,3.493)
  silkscreen extent -2.52,-4.35 0.9,4.35, body extent -2,-4.35 2,4.35, height 1.1
SSOP28 [mm]
  oval 2.1x0.45 smd: 1(-3.45,4.225) 2(-3.45,3.575) 3(-3.45,2.925) 4(-3.45,2.275) 5(-3.45,1.625) 6(-3.45,0.975) 7(-3.45,0.325) 8(-3.45,-0.325) 9(-3.45,-0.975) 10(-3.45,-1.625) 11(-3.45,-2.275) 12(-3.45,-2.925) 13(-3.45,-3.575) 14(-3.45,-4.225) 15(3.45,-4.225) 16(3.45,-3.575) 17(3.45,-2.925) 18(3.45,-2.275) 19(3.45,-1.625) 20(3.45,-0.975) 21(3.45,-0.325) 22(3.45,0.325) 23(3.45,0.975) 24(3.45,1.625) 25(3.45,2.275) 26(3.45,2.925) 27(3.45,3.575) 28(3.45,4.225)
  silkscreen extent -3.57,-5.25 2,5.25, body extent -2.8,-5.25 2.8,5.25, height 2
TO-PMOD-7 [mm]
  rect 0.89x3.06 smd: 1(-3.81,-7.305) 2(-2.54,-7.305) 3(-1.27,-7.305) 4(0,-7.305) 5(1.27,-7.305) 6(2.54,-7.305) 7(3.81,-7.305)
  rect 5.35x8.54 smd: 4(0,0)
  silkscreen extent -5.08,-6.35 5.08,6.35, body extent -4.75,-5 4.75,6, height 5.08
TSSOP8 [mm]
  oval 1.55x0.35 smd: D1(-2.875,0.975) D2(2.875,0.975) G1(-2.875,-0.975) G2(2.875,-0.975) S1(-2.875,-0.325) S1(-2.875,0.325) S2(2.875,-0.325) S2(2.875,0.325)
  silkscreen extent -3,-1.55 1.7,1.83, body extent -2.25,-1.55 2.25,1.55, height 1.2

## Part data
C1A C1B C1C C1D C1E C2A C2B C2C C2D C2E C3A C3B C3C C3D C3E C4A C4B C4C C4D C4E C5A C5B C5C C5D C5E C6A C6B C6C C6D C6E C7A C7B C7C C7D C7E C8A C8B C8C C8D C8E C9A C9B C9C C9D C9E C10A C10B C10C C10D C10E C11A C11B C11C C11D C11E C12A C12B C12C C12D C12E C13A C13B C13C C13D C13E C14A C14B C14C C14D C14E C15A C15B C15C C15D C15E C16A C16B C16C C16D C16E C17A C17B C17C C17D C17E C18A C18B C18C C18D C18E C19A C19B C19C C19D C19E C20 C21 C22: library part Cap, "Capacitor"
D1 D2 D3 D4 D5 D6 D7 D8 D9 D10 D11 D12 D13 D14 D15 D16 D17 D18 D19: "Typical INFRARED GaAs LED"
FB1A FB1B FB1C FB1D FB1E FB2A FB2B FB2C FB2D FB2E: library part Inductor, "Inductor"
P1 P2 P3 P4 P5 P6 P7 P8 P10 P11 P12 P14 P15 P16: library part "Header 2", "Header, 2-Pin"
P9: library part "Header 3", "Header, 3-Pin"
P13: library part "Header 4", "Header, 4-Pin"
Q1A Q1B Q1C Q1D Q1E Q2A Q2B Q2C Q2D Q2E: "N-Channel MOSFET"
R1A R1B R1C R1D R1E R2A R2B R2C R2D R2E R3A R3B R3C R3D R3E R4A R4B R4C R4D R4E R5A R5B R5C R5D R5E R6A R6B R6C R6D R6E R7A R7B R7C R7D R7E R8A R8B R8C R8D R8E R9A R9B R9C R9D R9E R10A R10B R10C R10D R10E R11A R11B R11C R11D R11E R12A R12B R12C R12D R12E R13A R13B R13C R13D R13E R14A R14B R14C R14D R14E R15A R15B R15C R15D R15E R16A R16B R16C R16D R16E R17A R17B R17C R17D R17E R18A R18B R18C R18D R18E R19 R20 R21 R22 R23 R24 R25 R26 R27 R28 R29 R30 R31 R32 R33 R34 R35 R36 R37 R38 R39 R40 R41 R42 R43 R44A R44B R44C R44D R44E R45A R45B R45C R45D R45E R46 R47 R48 R49 R50 R51 R52 R53 R54 R55 R56 R57 R58 R59 R60 R61 R62 R63 R64: library part Res3, "Resistor"
U1A U1B U1C U1D U1E U3A U3B U3C U3D U3E: "1A SIMPLE SWITCHER® Power Module for High Output  Voltage"
U2A U2B U2C U2D U2E: "Dual Ideal Diode and  Hot Swap Controller"
U4 U5 U6 U7: "Double channel high-side driver with analog current sense"
U8 U9 U12: "16-Bit I/O Expander with Serial Interface"
U10 U11: "Single Protected High Side Switches"

## Free pads (board coordinates)
  round 7 hole 3.2: 0(7.5,7.5) 1(7.5,102.5) 2(215,102.5) 3(215,7.5)

## Via types
v1: diameter 0.7, hole 0.3, Top Layer to Bottom Layer, tented both sides, 231 vias
v2: diameter 0.7, hole 0.3, Top Layer to Bottom Layer, tented bottom, 120 vias
v3: diameter 0.66, hole 0.33, Top Layer to Bottom Layer, tented both sides, 96 vias
v4: diameter 1.27, hole 0.711, Top Layer to Bottom Layer, tented both sides, 40 vias

## Nets (pads, with @x,y where several pads share a name; then routed paths per layer and width w, separated by ;. In a path a pad name is that pad's centre, name@x,y a point inside that pad or via, vN(x,y) a via of type N, cw(c..) or ccw(c..) an arc to the next point about the centre after c; other vN are vias at no path point)
3V0_PAYLOAD_EN: U8.7 U11.4 | length 39.4
  Top Layer w0.152: v1(47.244,41.656) U11.4@47.244,43.378 ; U8.7@78.176,41.929 80.791,41.929 v1(81.28,42.418)
  Bottom Layer w0.152: v1(47.244,41.656) 80.518,41.656 v1(81.28,42.418)
3V3_BUS: C1A.2 P9.1 P16.2 Q1A.S2 Q2A.S1 R58.1 U2A.14 U2A.23 U11.2 U11.3 U11.6 U11.7 | length 120.7
  Top Layer w0.152: P9.1@14.971,48.499 35.793,48.499 ; 37.46,25.4 R58.1@38.874,25.4
  Top Layer w0.254: 35.468,53.58 Q2A.S1@35.468,54.54 ; 35.468,53.58 35.793,53.255 ; 35.793,52.765 35.793,53.255 ; Q2A.S1@36.118,54.54 36.118,53.58 35.793,53.255 ; 38.133,46.159 40.538,48.565 40.538,51.365 42.461,53.288 U2A.14@42.461,55.015 ; U2A.23@48.176,55.015 48.176,53.795 48.747,53.224 54.589,53.224 ; U11.6@48.582,37.948 U11.3@48.582,42.748 ; U11.3@48.608,43.472 48.608,45.933 ; U11.7@49.852,37.948 U11.2@49.852,42.748 ; U11.2@49.878,43.472 49.878,45.933 ; Q1A.S2@54.518,54.54 54.518,53.295 54.589,53.224 ; Q1A.S2@55.168,54.54 55.168,53.629 54.763,53.224 54.589,53.224
  Top Layer w1.016: 35.793,52.944 35.793,48.499 38.333,45.959 ; P16.2@37.46,17.5 37.46,25.4 37.46,45.086 38.333,45.959 ; 38.133,46.159 38.333,45.959 ; 54.763,52.944 54.763,48.419 52.303,45.959 38.333,45.959
3V3_EXT: P8.2 P9.3 R59.1 | length 16.5
  Top Layer w0.152: P8.2@18,37.04 R59.1@26.99,37.04
  Bottom Layer w0.152: P9.3@14.732,43.18 18,39.912 P8.2@18,37.04
3V3_FAULT1: U2A.21 U8.4 | length 43
  Top Layer w0.152: v1(44.868,57.15) 45.674,56.344 46.438,56.344 46.906,55.876 U2A.21@46.906,55.015 ; v1(72.339,43.838) 76.865,43.838 76.906,43.879 U8.4@78.176,43.879
  Bottom Layer w0.152: v1(44.868,57.15) 44.868,56.336 54.61,46.594 69.152,46.594 71.049,44.696 71.049,44.309 71.388,43.97 72.207,43.97 v1(72.339,43.838)
3V3_FAULT2: U2A.16 U8.5 | length 42.6
  Top Layer w0.152: U2A.16@43.731,55.015 43.731,56.865 v1(44.015,57.15) ; v1(71.628,43.128) 71.729,43.229 U8.5@78.176,43.229
  Bottom Layer w0.152: v1(44.015,57.15) 44.015,56.539 54.61,45.944 68.812,45.944 v1(71.628,43.128)
3V3_PAYLOAD: P14.2 R56.1 U11.1 U11.8 | length 30
  Top Layer w0.152: 52.46,25.654 52.614,25.5 R56.1@53.974,25.5
  Top Layer w0.508: U11.8@51.148,38.672 52.396,38.672 ; U11.1@51.148,43.472 52.422,43.472
  Top Layer w1.016: P14.2@52.46,17.5 52.46,25.654 52.46,43.434
3V3_PWR: C20.1 C21.1 C22.1 D12.1 D13.1 J1.1 J2.1 J3.1 J4.1 J5.1 J6.1 J7.1 J8.1 J9.1 P9.2 P13.4 R31.1 R32.1 R43.1 R60.1 R61.1 R62.1 U8.9 U9.9 U12.9 | length 485.4
  Top Layer w0.152: P13.4@14.732,58.42 20.32,58.42 21.559,57.181 27.695,57.181 R62.1@27.695,55.423 R61.1@27.695,53.391 ; v1(21.9,61.21) 21.94,61.17 D12.1@23.3,61.17 ; v1(21.9,63.202) D13.1@23.3,63.202 ; 27.686,57.19 28.8,57.19 ; R60.1@28.8,58.59 28.8,57.19 ; v1(30.48,56.134) 29.424,57.19 28.8,57.19 ; R31.1@75.022,37.582 73.794,37.582 73.752,37.54 ; U8.9@78.176,40.629 76.185,40.629 75.022,41.792 73.752,40.522 73.752,37.54 ; J3.1@87.976,40.427 94.233,40.427 95.088,39.572 95.088,36.778 93.564,35.254 ; v1(95.25,7.112) 95.25,33.568 93.564,35.254 ; R32.1@123.252,38.828 122.024,38.828 121.982,38.786 ; U9.9@126.406,41.875 124.415,41.875 123.938,42.352 C21.1@123.19,42.352 122.566,42.352 121.982,41.768 121.982,38.786 ; J6.1@136.206,41.673 J5.1@138.746,41.673 J4.1@141.286,41.673 142.463,41.673 143.318,40.818 143.318,38.024 ; v1(153.416,7.112) 153.416,27.926 143.318,38.024 ; R43.1@161.158,39.372 159.93,39.372 159.888,39.33 ; U12.9@164.312,42.419 162.321,42.419 C22.1@161.158,43.582 159.888,42.312 159.888,39.33 ; J9.1@174.112,42.217 180.369,42.217 181.224,41.362 181.224,38.568 179.7,37.044 169.672,37.044 ; v1(183.847,7.161) 184.912,8.227 184.912,26.416 182.118,29.21 176.022,29.21 169.672,35.56 169.672,37.044 ; 73.752,37.54 73.752,36.016 74.514,35.254 93.564,35.254 ; 121.982,38.786 121.982,37.262 122.744,36.5 141.794,36.5 143.318,38.024 ; 159.888,39.33 159.888,37.806 160.65,37.044 169.672,37.044
  Bottom Layer w0.152: P9.2@14.732,45.72 30.48,45.72 ; v1(21.9,63.202) v1(21.9,61.21) 25.96,57.15 29.464,57.15 v1(30.48,56.134) 30.48,45.72 ; v1(183.847,7.161) 38.862,7.161 30.48,15.543 30.48,45.72
3V3_PWRGD1: U2A.22 U8.3 | length 41.8
  Top Layer w0.152: v1(45.72,57.15) 45.974,56.896 46.99,56.896 47.541,56.345 U2A.22@47.541,55.015 ; v1(71.628,44.549) 71.648,44.529 U8.3@78.176,44.529
  Bottom Layer w0.152: v1(45.72,57.15) 45.72,56.134 54.61,47.244 68.933,47.244 v1(71.628,44.549)
3V3_PWRGD2: U2A.15 U8.6 | length 43.8
  Top Layer w0.152: U2A.15@43.096,55.015 43.163,55.082 v1(43.163,57.15) ; v1(72.339,42.417) 72.5,42.579 U8.6@78.176,42.579
  Bottom Layer w0.152: v1(43.163,57.15) 43.163,56.741 54.61,45.294 69.031,45.294 71.049,43.275 71.049,42.888 71.388,42.549 72.207,42.549 v1(72.339,42.417)
5V0_BUS: C1B.2 P15.2 Q1B.S2 Q2B.S1 R57.1 U2B.14 U2B.23 U10.2 U10.3 U10.6 U10.7 | length 105.5
  Top Layer w0.152: 82.46,24.982 83.456,24.982 R57.1@83.974,25.5
  Top Layer w0.254: 58.413,53.257 58.413,53.542 ; Q2B.S1@58.413,54.502 58.413,53.542 ; 59.063,53.257 59.063,53.542 ; Q2B.S1@59.063,54.502 59.063,53.542 ; 60.276,46.924 61.656,46.924 63.499,48.767 63.499,51.925 65.406,53.832 U2B.14@65.406,54.977 ; U10.6@60.774,38.418 U10.3@60.774,43.218 ; U10.3@60.863,43.603 60.863,45.987 61.028,46.152 ; U10.7@62.044,38.418 U10.2@62.044,43.218 ; 62.044,45.921 62.133,45.832 U10.2@62.133,43.603 ; U2B.23@71.121,54.977 71.121,53.847 71.782,53.186 77.534,53.186 ; Q1B.S2@77.463,54.502 77.463,53.257 77.534,53.186 ; Q1B.S2@78.113,54.502 78.113,53.591 77.708,53.186 77.534,53.186 ; 58.413,53.542 58.738,53.217 59.063,53.542
  Top Layer w1.016: 58.738,52.906 58.738,52.727 58.738,48.461 60.276,46.924 61.278,45.921 62.044,45.921 69.088,45.921 ; 77.708,52.906 77.708,48.381 75.248,45.921 69.088,45.921 ; P15.2@82.46,17.5 82.46,24.982 69.088,38.354 69.088,45.921
5V0_EN1: R6B.2 R9B.1 U1B.3 U8.25 | length 57.7
  Top Layer w0.152: v1(80.01,51.562) 80.01,64.77 80.772,65.532 90.17,65.532 v1(91.948,67.31) ; v1(83.375,43.879) U8.25@85.076,43.879 ; v1(91.948,75.692) 92.393,75.247 R9B.1@92.393,74.202
  Top Layer w0.254: R6B.2@89.853,74.202 R9B.1@92.393,74.202 93.663,75.472 U1B.3@93.663,81.822
  Bottom Layer w0.152: v1(80.01,51.562) 80.01,50.292 83.375,46.927 v1(83.375,43.879) ; v1(91.948,67.31) v1(91.948,75.692)
5V0_EN2: R15B.2 R18B.1 U3B.3 U8.26 | length 49.6
  Top Layer w0.152: v1(74.676,75.946) 74.676,74.393 R18B.1@74.867,74.202 ; v1(82.725,44.529) U8.26@85.076,44.529
  Top Layer w0.254: R15B.2@72.327,74.202 R18B.1@74.867,74.202 ; R18B.1@74.867,74.202 75.185,74.519 76.137,75.472 U3B.3@76.137,81.822
  Bottom Layer w0.152: v1(74.676,75.946) 74.676,54.864 82.725,46.815 v1(82.725,44.529)
5V0_FAULT1: U2B.21 U8.27 | length 20.2
  Top Layer w0.152: U2B.21@69.851,54.977 69.851,53.339 v1(70.866,52.324) ; v1(80.677,45.371) 83.572,45.371 83.764,45.179 U8.27@85.076,45.179
  Bottom Layer w0.152: v1(70.866,52.324) 72.136,52.324 79.089,45.371 v1(80.677,45.371)
5V0_FAULT2: U2B.16 U8.1 | length 19.8
  Top Layer w0.152: U2B.16@66.676,54.977 v1@66.676,56.262 ; U8.1@78.176,45.829 79.248,46.901 79.248,47.752 v1(79.294,47.798)
  Bottom Layer w0.152: v1(66.802,56.388) 70.704,56.388 v1(79.294,47.798)
5V0_PAYLOAD: P12.2 R55.1 U10.1 U10.8 | length 31.3
  Top Layer w0.152: 67.46,25.4 R55.1@68.874,25.4
  Top Layer w0.508: U10.8@63.403,38.803 64.711,38.803 ; U10.1@63.403,43.603 64.685,43.603
  Top Layer w1.016: 64.77,43.688 64.77,37.436 67.46,34.746 67.46,25.4 P12.2@67.46,17.5
5V0_PAYLOAD_EN: U8.8 U10.4 | length 29.2
  Top Layer w0.152: v1@59.593,41.163 U10.4@59.593,43.603 ; U8.8@78.176,41.279 81.346,41.279 v1(81.883,41.815)
  Bottom Layer w0.152: v1(59.436,41.006) 81.073,41.006 v1(81.883,41.815)